# Altium PCB PCB1.PcbDoc (part 2 of 4)
Units mm, origin at the board's own origin, x right, y up, seen from the top; angles counter-clockwise.
Board outline 120 x 70 mm, 6 copper layers (SIG TOP, GND1, PWR, SIG, GND2, SIG BOT), stack 1.538 mm thick; 355 components, 304 nets, 1156 pads, 166 vias.
Unrouted connection lines stored in the file: 534.
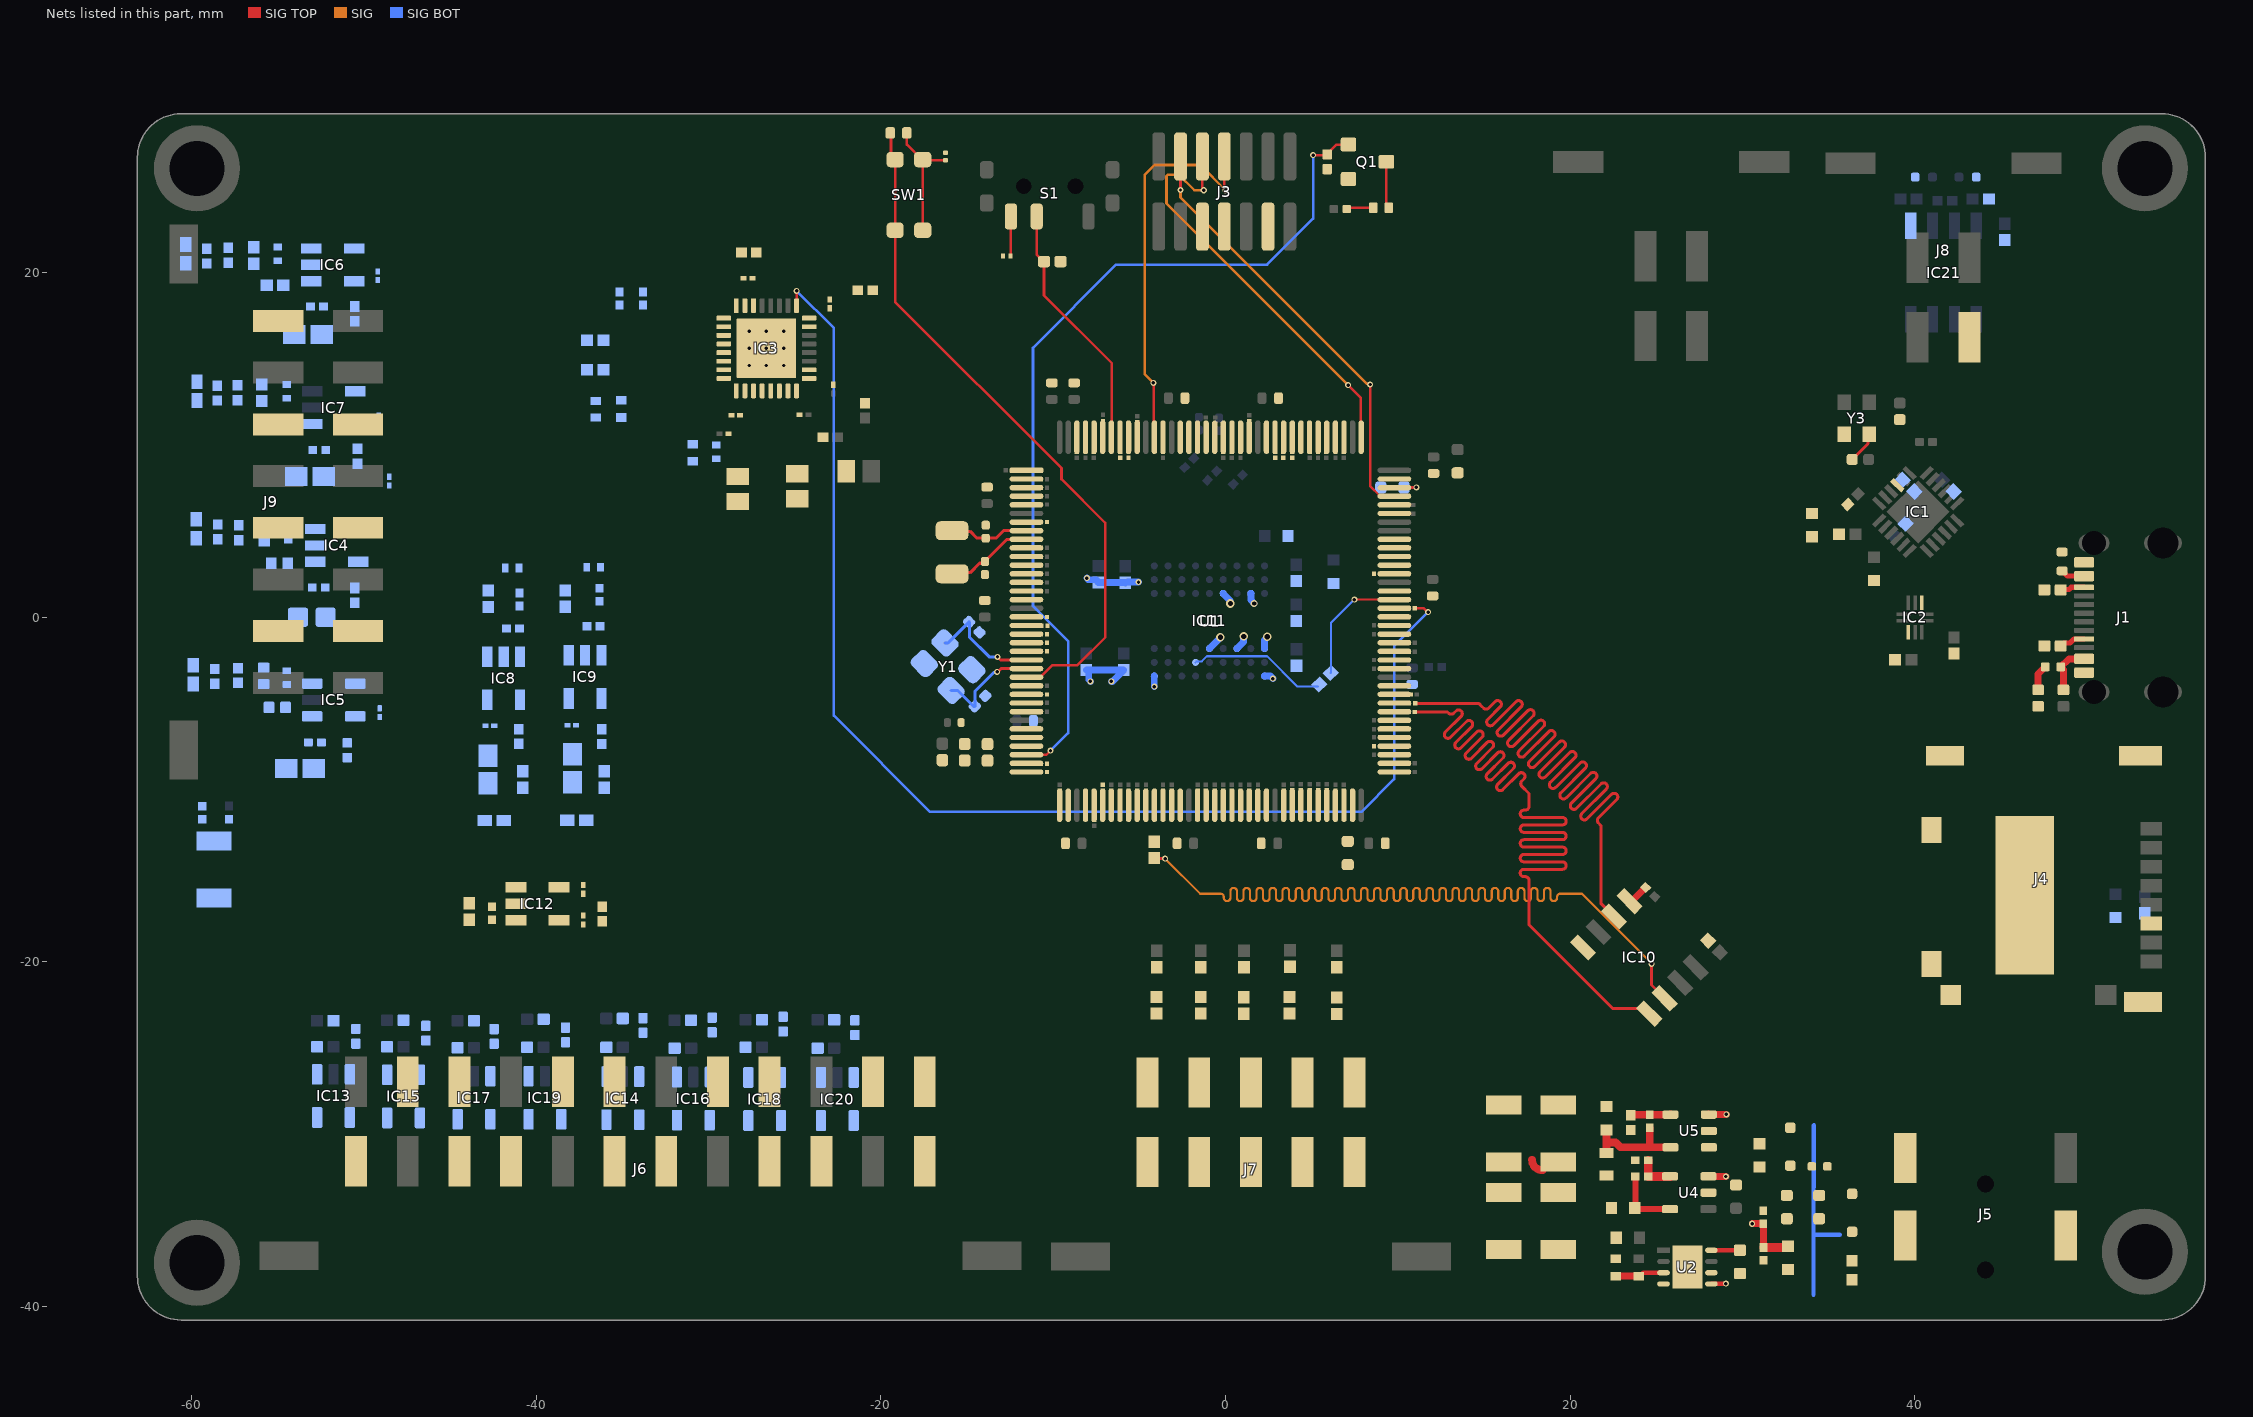
[diagram p5: the nets of this part, all layers, seen from the top]

## Footprints (in the part's own frame and the unit in brackets; to place one, negate y for a bottom-side part, rotate by r counter-clockwise, add the part's x,y. Pads: shape width x height; smd on the part's side, far side on the other; paste and mask are expansions set on the pad) (continued)
IS42S16800J-7BLI-TR [mm]
  round 0.41 smd: A1(-3.116,3.22) A2(-2.316,3.22) A3(-1.516,3.22) A7(1.684,3.22) A8(2.484,3.22) A9(3.284,3.22) B1(-3.116,2.42) B2(-2.316,2.42) B3(-1.516,2.42) B7(1.684,2.42) B8(2.484,2.42) B9(3.284,2.42) C1(-3.116,1.62) C2(-2.316,1.62) C3(-1.516,1.62) C7(1.684,1.62) C8(2.484,1.62) C9(3.284,1.62) D1(-3.116,0.82) D2(-2.316,0.82) D3(-1.516,0.82) D7(1.684,0.82) D8(2.484,0.82) D9(3.284,0.82) E1(-3.116,0.02) E2(-2.316,0.02) E3(-1.516,0.02) E7(1.684,0.02) E8(2.484,0.02) E9(3.284,0.02) F1(-3.116,-0.78) F2(-2.316,-0.78) F3(-1.516,-0.78) F7(1.684,-0.78) F8(2.484,-0.78) F9(3.284,-0.78) G1(-3.116,-1.58) G2(-2.316,-1.58) G3(-1.516,-1.58) G7(1.684,-1.58) G8(2.484,-1.58) G9(3.284,-1.58) H1(-3.116,-2.38) H2(-2.316,-2.38) H3(-1.516,-2.38) H7(1.684,-2.38) H8(2.484,-2.38) H9(3.284,-2.38) J1(-3.116,-3.18) J2(-2.316,-3.18) J3(-1.516,-3.18) J7(1.684,-3.18) J8(2.484,-3.18) J9(3.284,-3.18)
  silkscreen extent -4.02,-3.98 4.08,4.12, body extent -4,-4 4,4, height 1.2
MSD12A [mm]
  rect 0.8x1.24 smd: 1(-2.9,5.725) 2(-1.8,5.725) 3(-0.7,5.725) 4(0.4,5.725) 5(1.5,5.725) 6(2.6,5.725) 7(3.7,5.725) 8(4.8,5.725)
  rect 1.15x2.5 smd: 9(-7.145,5.096)
  rect 1.15x2.2 smd: 10(-7.145,-6.234) 14(7.145,5.245)
  rect 1.5x1.15 smd: 11(-2.84,-7.029) 12(4.94,-7.029)
  rect 1.16x1.2 smd: 13(6.74,-5.904)
  rect 9.2x3.4 smd: 15(0.95,-1.605)
  rect 1.16x1.25 smd: CD1(6.74,3.096)
  silkscreen extent -7.07,-7.35 7.07,8.25, body extent -7.47,-7.43 7.47,7.62, height 1.37
NETTIE_SMD [mil]
  rect 10x10 smd paste+0 mask-1000: 1(-7,0) 2(7,0)
  SIG TOP region: -3,-5 3,-5 3,5 -3,5
PCM12SMTBR [mm]
  rrect50% 0.7x1.5 smd: 1(-2.25,1.75) 2(0.75,1.75) 3(2.25,1.75)
  round 0.45 hole 0.9 unplated: MH1(-1.5,0) MH2(1.5,0)
  rrect50% 0.8x1 smd: MP1(-3.65,0.965) MP2(3.65,0.965) MP3(-3.65,-0.965) MP4(3.65,-0.965)
  silkscreen extent -2.8,-2.8 2.8,3.05, body extent -3.85,-2.83 3.85,2.17, height 1.43
QFN40P140X180X50-10N [mm]
  rrect10% 0.85x0.2 smd: 1(-0.65,0.2) 2(-0.65,-0.2) 6(0.65,-0.2) 7(0.65,0.2)
  rrect10% 0.2x0.85 smd: 3(-0.4,-0.85) 4(0,-0.85) 5(0.4,-0.85) 8(0.4,0.85) 9(0,0.85) 10(-0.4,0.85)
  silkscreen extent -1.17,0.7 -0.98,0.9, body extent -0.7,-0.9 0.7,0.9, height 0.48
QFN50P400X400X100-25N-D [mm]
  rect 0.9x0.3 smd: 1(-1.95,1.25) 2(-1.95,0.75) 3(-1.95,0.25) 4(-1.95,-0.25) 5(-1.95,-1.25) 6(-1.95,-0.75) 13(1.95,-1.25) 14(1.95,-0.75) 15(1.95,-0.25) 16(1.95,0.25) 17(1.95,0.75) 18(1.95,1.25)
  rect 0.3x0.9 smd: 7(-1.25,-1.95) 8(-0.75,-1.95) 9(-0.25,-1.95) 10(0.25,-1.95) 11(0.75,-1.95) 12(1.25,-1.95) 19(1.25,1.95) 20(0.75,1.95) 21(0.25,1.95) 22(-0.25,1.95) 23(-0.75,1.95) 24(-1.25,1.95)
  rect 2.6x2.6 smd: 25(0,0)
  silkscreen extent -2.52,1.88 -2.28,2.12, body extent -2.05,-2.05 2.05,2.05, height 1
RASM742TRX [mm]
  rect 1.3x2.9 smd: 1(-4.65,1.15) 2(-4.65,-3.35) 3(4.65,-3.35) 4(4.65,1.15)
  round 0.5 hole 1 unplated: 5(0,3.15) 6(0,-1.85)
  silkscreen extent -5.9,-4.65 4,4.65, body extent -5.1,-4.55 4.7,4.75, height 5.15
RESC1005X40X25LL05T10#1 [mm] "Chip Resistor, 2-Leads, Body 1.00x0.50mm, IPC High Density"
  rrect20% 0.5x0.45 smd: 1(-0.375,0) 2(0.375,0)
  body extent -0.53,-0.27 0.53,0.28, height 0.4
RESC1005X40X25LL05T10#2 [mm] "Chip Resistor, 2-Leads, Body 1.00x0.50mm, IPC High Density"
  rrect25% 0.5x0.45 smd: 1(-0.375,0) 2(0.375,0)
  body extent -0.53,-0.27 0.53,0.28, height 0.4
RESC1005X40X25LL05T10#3 [mm] "Chip Resistor, 2-Leads, Body 1.00x0.50mm, IPC High Density"
  rect 0.5x0.45 smd: 1(-0.375,0) 2(0.375,0)
  body extent -0.53,-0.27 0.52,0.28, height 0.4
RESC1005X40X25LL05T10#4 [mm] "Chip Resistor, 2-Leads, Body 1.00x0.50mm, IPC High Density"
  rrect50% 0.5x0.45 smd: 1(-0.375,0) 2(0.375,0)
  body extent -0.53,-0.27 0.53,0.28, height 0.4
RESC1005X40X25ML05T10#1 [mm] "Chip Resistor, 2-Leads, Body 1.00x0.50mm, IPC Low Density"
  rect 0.7x0.65 smd: 1(-0.475,0) 2(0.475,0)
  body extent -0.53,-0.27 0.53,0.28, height 0.4
RESC1005X40X25ML05T10#2 [mm] "Chip Resistor, 2-Leads, Body 1.00x0.50mm, IPC Low Density"
  rrect50% 0.635x0.65 smd: 1(-0.475,0) 2(0.475,0)
  body extent -0.53,-0.27 0.53,0.28, height 0.4
RESC1005X40X25ML05T10#3 [mm] "Chip Resistor, 2-Leads, Body 1.00x0.50mm, IPC Low Density"
  rrect25% 0.7x0.65 smd: 1(-0.475,0) 2(0.475,0)
  body extent -0.53,-0.27 0.53,0.28, height 0.4
RESC1005X40X25NL05T10#1 [mm] "Chip Resistor, 2-Leads, Body 1.00x0.50mm, IPC Medium Density"
  rrect25% 0.6x0.55 smd: 1(-0.425,0) 2(0.425,0)
  body extent -0.53,-0.27 0.53,0.28, height 0.4
RESC1005X40X25NL05T10#2 [mm] "Chip Resistor, 2-Leads, Body 1.00x0.50mm, IPC Medium Density"
  rect 0.6x0.55 smd: 1(-0.425,0) 2(0.425,0)
  body extent -0.53,-0.27 0.53,0.28, height 0.4
RESC1608X55X25LL10T15 [mm] "Chip Resistor, 2-Leads, Body 1.60x0.80mm, IPC High Density"
  rect 0.6x0.8 smd: 1(-0.65,0) 2(0.65,0)
  body extent -0.85,-0.45 0.85,0.45, height 0.55
SOIC127P600X175-8N [mm]
  rect 1.525x0.65 smd: 1(-2.712,1.905) 2(-2.712,0.635) 3(-2.712,-0.635) 4(-2.712,-1.905) 5(2.712,-1.905) 6(2.712,-0.635) 7(2.712,0.635) 8(2.712,1.905)
  silkscreen extent -3.47,-2.45 1.6,2.58, body extent -3,-2.45 3,2.45, height 1.75
SOT95P280X145-5N#1 [mm]
  rect 1.2x0.6 smd: 1(-1.25,0.95) 2(-1.25,0) 3(-1.25,-0.95) 4(1.25,-0.95) 5(1.25,0.95)
  silkscreen extent -1.85,-1.45 0.3,1.5, body extent -1.4,-1.45 1.4,1.45, height 1.2
SOT95P280X145-5N#2 [mm]
  rrect25% 1.2x0.6 smd: 1(-1.25,0.95) 2(-1.25,0) 3(-1.25,-0.95) 4(1.25,-0.95) 5(1.25,0.95)
  silkscreen extent -1.85,-1.45 0.3,1.5, body extent -1.4,-1.45 1.4,1.45, height 1.2
TLV320AIC3104IRHBR [mm]
  rrect36% 0.85x0.28 smd: 1(-2.781,1.257) 2(-2.781,0.757) 3(-2.781,0.257) 4(-2.781,-0.243) 5(-2.781,-0.743) 6(-2.781,-1.243) 7(-2.781,-1.743) 8(-2.781,-2.243) 17(2.169,-2.243) 18(2.169,-1.743) 19(2.169,-1.243) 20(2.169,-0.743) 21(2.169,-0.243) 22(2.169,0.257) 23(2.169,0.757) 24(2.169,1.257)
  rrect36% 0.28x0.85 smd: 9(-2.056,-2.968) 10(-1.556,-2.968) 11(-1.056,-2.968) 12(-0.556,-2.968) 13(-0.056,-2.968) 14(0.444,-2.968) 15(0.944,-2.968) 16(1.444,-2.968) 25(1.444,1.982) 26(0.944,1.982) 27(0.444,1.982) 28(-0.056,1.982) 29(-0.556,1.982) 30(-1.056,1.982) 31(-1.556,1.982) 32(-2.056,1.982)
  rrect3% 3.45x3.45 smd: 33(-0.306,-0.493)
  silkscreen extent -3.66,-3.07 2.27,2.08, body extent -2.81,-2.99 2.19,2.01, height 1
VARC1005X41N#1 [mm]
  rect 0.85x0.65 smd: 1(-0.55,0) 2(0.55,0)
  silkscreen extent 0,-0.15 0,0.15, body extent -0.5,-0.25 0.5,0.25, height 0.41
VARC1005X41N#2 [mm]
  rect 0.65x0.65 smd: 1(-0.55,0) 2(0.55,0)
  silkscreen extent 0,-0.15 0,0.15, body extent -0.5,-0.25 0.5,0.25, height 0.41
VARC1005X41N#3 [mm]
  rrect50% 0.508x0.65 smd: 1(-0.55,0) 2(0.55,0)
  silkscreen extent 0,-0.15 0,0.15, body extent -0.5,-0.25 0.5,0.25, height 0.41

## Part data
C1 C2 C3 C8 C9 C10 C11 C12 C13 C18 C19 C20 C21 C22 C85 C87 C88 C89 C90 C91 C95 C96 C97 C98 C99 C100 C101 C103 C105 C124 C125 C126: library part CMP-06035-028957-1, "Ceramic Capacitor for Automotive 100nF ±20% 50VDC X7R 0402 Paper T/R", Capacitance=100nF
C4 C5: library part CMP-06035-053638-1, "Ceramic Capacitor for Automotive 10pF ±2% 50VDC X8G 0402 Paper T/R", Capacitance=10pF
C6 C7: library part CMP-06035-005325-1, "Ceramic Capacitor for Automotive 3.3pF ±0.25pF 50VDC C0G 0402 Paper T/R", Capacitance=3.3pF, Case Code (Imperial)=0402, Case Code (Metric)=1005, Dielectric=C0G, Max Operating Temperature=125°C, Min Operating Temperature=-55°C, Package Quantity=50000, Ratings=AEC-Q200, Voltage Rating=50V, Case/Package=0402, Height=0.5mm, Length=0.039inch, Mount="Surface Mount", Packaging="Tape and Reel", Termination=SMD/SMT, Thickness=0.022inch, Voltage Rating (DC)=50V, Weight=0.000212oz, Width=0.5mm
C14 C15 C16 C17 C68 C69 C70 C71 C76 C86 C92 C93 C94 C102 C104: library part CMP-00260-57357036-1, "GCM188C71A225KE02D Multilayer Ceramic Capacitor, 2.2 uF, 10 V, ± 10%, X7S, 0603 [1608 Metric]", Capacitance=2.2uF, Lifecycle Status=Production, NexarPartId=57357036, RoHS=Non-Compliant
C23 C77 C79 C80 C82 C83 C84 C108 C109 C110 C111 C112 C113 C114 C115 C116 C117 C118 C119 C120 C121 C122 C123 C129: library part CMP-06035-028957-1, "Ceramic Capacitor for Automotive 100nF ±20% 50VDC X7R 0402 Paper T/R", Capacitance=100n
C24 C27 C28 C31 C33 C34 C35 C40 C46 C50 C58 C63 C106 C107: library part CMP-06035-001619-1, "Chip Multilayer Ceramic Capacitors for General Purpose, 0201, 0.10uF, X7S, 22%, 20%, 16V", Capacitance=100nF, Dielectric=X7S, Tolerance=20%, Voltage Rating (DC)=16V, Length=600um, Thickness=300um, Width=300um
C25 C26 C29 C32: library part CMP-06035-036014-1, "Chip Multilayer Ceramic Capacitors for General Purpose, 0402, 1.0uF, X7S, 22%, 20%, 6.3V", Capacitance=1uF, Dielectric=X7S, Tolerance=20%, Voltage Rating (DC)=6.3V, Length=1mm, Thickness=500um, Width=500um
C30 C54 C55: library part CMP-06035-031044-1, "Chip Multilayer Ceramic Capacitors for General Purpose, 0805, 10uF, X6S, 22%, 10%, 25V", Capacitance=10uF, Case/Package=0805, Dielectric=X6S, Tolerance=10%, Voltage Rating (DC)=25V, Length=2mm, Thickness=1.25mm, Width=1.25mm
C36 C41 C47 C51 C56 C59 C64: library part CMP-06035-055122-1, "Ceramic Capacitor for Automotive 10nF ±10% 50VDC X7R 0402 Paper T/R", Capacitance=10nF
C37 C42 C48 C52 C60 C65: library part CMP-06035-021772-1, "Ceramic Capacitor for Automotive 10uF ±20% 4VDC X7T 0603 Paper T/R", Capacitor=10u
C38 C39 C43 C44 C61 C62 C66 C67: library part CMP-06035-007229-1, "Ceramic Capacitor for Automotive 220pF ±10% 50VDC X7R 0402 Paper T/R", Capacitance=220pF, Case Code (Imperial)=0402, Case Code (Metric)=1005, Dielectric=X7R, Max Operating Temperature=125°C, Min Operating Temperature=-55°C, Package Quantity=50000, Tolerance=10%, Voltage Rating=50V, Case/Package=0402, Depth=0.5mm, Height=0.5mm, Length=1mm, Mount="Surface Mount", Packaging="Tape and Reel", Radiation Hardening=No, Termination=SMD/SMT, Voltage Rating (DC)=50V
C45: library part CMP-06035-055308-1, "Ceramic Capacitor for Automotive 47uF ±10% 10VDC X7S 1210 Embossed T/R", Capacitance=47uF
C49 C53: library part CMP-06035-038116-1, "Ceramic Capacitor for Automotive 1nF ±10% 50VDC X7R 0402 Paper T/R", Capacitance=1nF
C57: library part CMP-00260-135863758-1, "GCM155D70G475ME36D AC 2C 216S Skt Recp", Capacitance=4.7µF, Case/Package=0402, Max Operating Temperature=125°C, Min Operating Temperature=-55°C, Tolerance=20%, Voltage Rating=4V, Height=700µm, Lifecycle Status=Production, Material=Ceramic, NexarPartId=135863758
C72 C73 C74 C75: library part CMP-06035-055308-1, "Ceramic Capacitor for Automotive 47uF ±10% 10VDC X7S 1210 Embossed T/R", Capacitance=47u
C78 C81: library part CMP-00260-57357036-1, "GCM188C71A225KE02D Multilayer Ceramic Capacitor, 2.2 uF, 10 V, ± 10%, X7S, 0603 [1608 Metric]", Capacitance=2u2, Lifecycle Status=Production, NexarPartId=57357036, RoHS=Non-Compliant
D1 D5: "Schottky Diode", Manufacturer_Name=Nexperia, Mouser Part Number=771-BAT165AX, Arrow Part Number=BAT165AX, Arrow Price/Stock=https://www.arrow.com/en/products/bat165ax/nexperia?utm_currency=USD&region=nac, Datasheet Link=https://assets.nexperia.com/documents/data-sheet/BAT165A.pdf, Height=1.1mm, Manufacturer_Part_Number=BAT165AX, Mouser Price/Stock=https://www.mouser.co.uk/ProductDetail/Nexperia/BAT165AX?qs=1fQ7IOp4WriMQ9TlJoQ5jw%3D%3D
D2: library part CMP-08952-000015-1, "LED GREEN CLEAR 1006 SMD", Colour=Green, Forward Current=20mA, Forward Voltage=2.1V, Manufacturer=Rohm, Package=SML-P1, Power Dissipation=52mW, Reverse Voltage=5V, Temperature="-40°C to +85°C", Temperature Range High=+85°C, Temperature Range Low=-40°C, Automotive=No, Category=Diode, ComponentLink2Description=Datasheet, ComponentLink2URL=https://d1d2qsbl8m0m72.cloudfront.net/en/products/databook/datasheet/opto/led/chip_mono/sml-p1-e.pdf, Device Class L1=Optoelectronics, Device Class L2=LEDs, Device Class L3=unset, Digikey Description="LED GREEN CLEAR 1006 SMD", Height=0.25mm, Lead Free=Yes, Led Orientation="Top View", Luminous Intensity=10mcd, Manufacturer Part Number=SML-P13PTT86R, Mouser Description="LED Uni-Color Green 2-Pin Chip 0402(1006Metric) T/R", Octopart=https://octopart.com/sml-p13ptt86r-rohm-59370256, RoHS=TRUE, Wavelength=560nm
D3 D4: library part CMP-07200-000010-1, "TVS DIODE 5.3V 14V 2X3DFN", Capacitance=0.3pF, Case/Package=DFN, Clamping Voltage=14V, Max Operating Temperature=150°C, Min Breakdown Voltage=7V, Min Operating Temperature=-55°C, Peak Pulse Current=3A, Power Line Protection=No, Resistor Type=Zener, Reverse Standoff Voltage=5.3V, Direction=Bidirectional, Element Configuration=Single, Lead Free="Lead Free", Mount="Surface Mount", Number of Bidirectional Channels=1, Number of Pins=2, Packaging="Tape and Reel", RoHS Compliant=Yes, Working Voltage=5.3V
FB1: library part CMP-06046-001231-1, "Chip Ferrite Bead, 0402, 1000Ω @ 100MHz, 0.65Ω, 25%, 300mA"
FB2 FB3: library part CMP-08257-000274-1, "Power line Ferrite Bead 120Ω @ 100MHz 1.5A DCR 0.095Ω SMD 0402", Case Code (Imperial)=0402, Case Code (Metric)=1005, DC Resistance (DCR)=95mR, Max Current Rating=1.5A, Max Operating Temperature=125°C, Min Operating Temperature=-55°C, Package Quantity=10000, Test Frequency=100MHz, Tolerance=25%, Case/Package=0402, Height=0.022inch, Impedance=120R, Length=0.039inch, Max DC Current=1.5A, Mount="Surface Mount", Number of Lines=1, Packaging="Tape and Reel", RoHS Compliant=Yes, Termination=SMD/SMT, Weight=2.3E-05oz, Width=0.02inch
IC1: "Integrated Circuit", Manufacturer_Name=Microchip, Mouser Part Number=886-USB3318C-CP-TR, Arrow Part Number=USB3318C-CP-TR, Arrow Price/Stock=null?region=nac, Datasheet Link=http://www.microchip.com/mymicrochip/filehandler.aspx?ddocname=en562029, Height=1mm, Manufacturer_Part_Number=USB3318C-CP-TR, Mouser Price/Stock=https://www.mouser.co.uk/ProductDetail/Microchip-Technology/USB3318C-CP-TR?qs=pA5MXup5wxEqKRd0j%252Bo%252BXA%3D%3D
IC2: "Integrated Circuit", Manufacturer_Name=NXP, Mouser Part Number=771-NX3DV42GU115, Arrow Part Number=NX3DV42GU,115, Arrow Price/Stock=https://www.arrow.com/en/products/nx3dv42gu115/nxp-semiconductors?region=nac, Datasheet Link=http://www.nxp.com/docs/en/data-sheet/NX3DV42.pdf, Height=0.5mm, Manufacturer_Part_Number=NX3DV42GU,115, Mouser Price/Stock=https://www.mouser.co.uk/ProductDetail/NXP-Semiconductors/NX3DV42GU115?qs=cbprxTG2Yq%252BinzuyAklGVQ%3D%3D
IC3: "Integrated Circuit", Manufacturer_Name="Texas Instruments", Mouser Part Number=595-TLV320C3104IRHBR, Arrow Part Number=TLV320AIC3104IRHBR, Arrow Price/Stock=https://www.arrow.com/en/products/tlv320aic3104irhbr/texas-instruments?utm_currency=USD&region=nac, Datasheet Link=http://www.ti.com/lit/ds/symlink/tlv320aic3104.pdf, Height=1mm, Manufacturer_Part_Number=TLV320AIC3104IRHBR, Mouser Price/Stock=https://www.mouser.co.uk/ProductDetail/Texas-Instruments/TLV320AIC3104IRHBR?qs=t6sYTo5dwUzbYVbTYmm%2FAg%3D%3D
IC4 IC5 IC6 IC7 IC8 IC9 IC12 IC13 IC14 IC15 IC16 IC17 IC18 IC19 IC20: "Integrated Circuit", Manufacturer_Name="Texas Instruments", Mouser Part Number=595-TLV9161IDBVR, Arrow Part Number=TLV9161IDBVR, Arrow Price/Stock=https://www.arrow.com/en/products/tlv9161idbvr/texas-instruments?utm_currency=USD&region=nac, Datasheet Link=https://www.ti.com/lit/ds/symlink/tlv9161.pdf?HQS=dis-mous-null-mousermode-dsf-pf-null-wwe&ts=1675947383550&ref_url=https%253A%252F%252Fwww.mouser.de%252F, Height=1.45mm, Manufacturer_Part_Number=TLV9161IDBVR, Mouser Price/Stock=https://www.mouser.co.uk/ProductDetail/Texas-Instruments/TLV9161IDBVR?qs=Rp5uXu7WBW%2FkWJAGvxG3xQ%3D%3D
IC10: "Integrated Circuit", Manufacturer_Name="Integrated Silicon Solution Inc.", Mouser Part Number=870-IS25LP080DJNLETR, Arrow Part Number=IS25LP080D-JNLE-TR, Arrow Price/Stock=https://www.arrow.com/en/products/is25lp080d-jnle-tr/integrated-silicon-solution-inc?region=nac, Datasheet Link=https://www.mouser.com/datasheet/2/198/25LP-WP080D-1003192.pdf, Height=1.75mm, Manufacturer_Part_Number=IS25LP080D-JNLE-TR, Mouser Price/Stock=https://www.mouser.co.uk/ProductDetail/ISSI/IS25LP080D-JNLE-TR?qs=pif5%252B9MYt0VkH9msMJ5aTQ%3D%3D
IC11: "Integrated Circuit", Manufacturer_Name="Integrated Silicon Solution Inc.", Datasheet Link=https://www.mouser.be/datasheet/2/198/42_45S81600J_16800J-3460583.pdf, Height=1.2mm, Manufacturer_Part_Number=IS42S16800J-7BLI-TR
IC21: "Integrated Circuit", Arrow Part Number=SP3494CN-L/TR, Manufacturer_Name=MaxLinear, Mouser Part Number=701-SP3494CN-L/TR, Arrow Price/Stock=https://www.arrow.com/en/products/sp3494cn-ltr/maxlinear-inc?region=nac, Datasheet Link=https://www.arrow.com/en/products/sp3494cn-ltr/maxlinear-inc?region=nac, Height=1.75mm, Manufacturer_Part_Number=SP3494CN-L/TR, Mouser Price/Stock=https://www.mouser.co.uk/ProductDetail/MaxLinear/SP3494CN-L-TR?qs=3EMgrMjM0faUFCPV%252BPTaUQ%3D%3D
J1: library part CMP-04767-000028-2, "CONN RCP USB2.0 TYP C 24P SMD RA", Current Rating=1.25A, Max Operating Temperature=85°C, Min Operating Temperature=-40°C, Voltage Rating=30V, Contact Material="Gold, Nickel", Gender=Receptacle, Height=3.36mm, NexarPartId=117190526, Number of Contacts=16, USB Standard="USB 2.0"
J2 J8: "Connector", Manufacturer_Name="TE Connectivity", Mouser Part Number=571-3-794627-4, Arrow Part Number=3-794627-4, Arrow Price/Stock=https://www.arrow.com/en/products/3-794627-4/te-connectivity?utm_currency=USD&region=europe, Datasheet Link=https://www.te.com/commerce/DocumentDelivery/DDEController?Action=srchrtrv&DocNm=micro-mate-n-lok-connector-qrg&DocType=Data%20Sheet&DocLang=English&PartCntxt=3-794627-4&DocFormat=pdf, Height=8.8mm, Manufacturer_Part_Number=3-794627-4, Mouser Price/Stock=https://www.mouser.co.uk/ProductDetail/TE-Connectivity-AMP/3-794627-4?qs=FGSkXkE%2FZ3Wegb353BDzUA%3D%3D
J3: library part CMP-02766-001448-1, "CONN HEADER SMD 14POS 1.27MM", Color=Black, Max Operating Temperature=125°C, Min Operating Temperature=-55°C, Package Quantity=1, Connector Type="Male Pin", Contact Material=Bronze, Contact Mating Length=0.12inch, Contact Plating=Gold, Contact Type="Male Pin", Depth=5.84mm, Gender=Male, Housing Color=Black, Housing Material=Polymer, Lead Free="Lead Free", Length=8.89mm, Mount="Surface Mount", Number of Contacts=14, Number of Positions=14, Number of Rows=2, Orientation=Straight, Packaging=Rail/Tube, Pitch=1.27mm, Radiation Hardening=No, RoHS Compliant=Yes, Row Spacing=0.05inch, Series=FTSH, Termination=Solder
J4: "Connector", Manufacturer_Name="Same Sky", Mouser Part Number=179-MSD-12-A, Arrow Part Number=MSD-12-A, Arrow Price/Stock=https://www.arrow.com/en/products/msd-12-a/cui-devices?utm_currency=USD&region=nac, Datasheet Link=https://www.sameskydevices.com/product/resource/MSD-12-A.pdf, Height=1.6mm, Manufacturer_Part_Number=MSD-12-A, Mouser Price/Stock=https://www.mouser.co.uk/ProductDetail/Same-Sky/MSD-12-A?qs=Z%252BL2brAPG1KTGgvYejyeAQ%3D%3D
J5: "Connector", Manufacturer_Name=Switchcraft, Mouser Part Number=502-RASM742TRX, Arrow Part Number=RASM742TRX, Arrow Price/Stock=https://www.arrow.com/en/products/rasm742trx/switchcraft?region=nac, Datasheet Link=https://www.mouser.ph/ProductDetail/Switchcraft/RASM742TRX?qs=mcPJWgAPNrdcPY6U4InXHg%3D%3D&srsltid=AfmBOooMj0kEPMqk1k0gwFmsjJjNoSaW62hNPqqtUxzbBym_46hZI4RS, Height=5.334mm, Manufacturer_Part_Number=RASM742TRX, Mouser Price/Stock=https://www.mouser.co.uk/ProductDetail/Switchcraft/RASM742TRX?qs=mcPJWgAPNrdcPY6U4InXHg%3D%3D
J6: "Connector", Manufacturer_Name="TE Connectivity", Datasheet Link=https://www.te.com/commerce/DocumentDelivery/DDEController?Action=srchrtrv&DocNm=micro-mate-n-lok-connector-qrg&DocType=Data%20Sheet&DocLang=English&PartCntxt=5-794627-4&DocFormat=pdf, Height=8.8mm, Manufacturer_Part_Number=5-794627-4
J7: "Connector", Manufacturer_Name="TE Connectivity", Mouser Part Number=571-4-794627-0, Arrow Part Number=4-794627-0, Arrow Price/Stock=https://www.arrow.com/en/products/4-794627-0/te-connectivity, Datasheet Link=https://www.te.com/commerce/DocumentDelivery/DDEController?Action=srchrtrv&DocNm=micro-mate-n-lok-connector-qrg&DocType=Data%20Sheet&DocLang=English&PartCntxt=4-794627-0&DocFormat=pdf, Height=8.67mm, Manufacturer_Part_Number=4-794627-0, Mouser Price/Stock=https://www.mouser.co.uk/ProductDetail/TE-Connectivity-AMP/4-794627-0?qs=%252BzEhGsOvNvVYq3FriCmQcA%3D%3D
J9: "Connector", Manufacturer_Name="TE Connectivity", Mouser Part Number=571-4-794629-6, Arrow Part Number=4-794629-6, Arrow Price/Stock=https://www.arrow.com/en/products/4-794629-6/te-connectivity?region=nac, Datasheet Link=https://www.te.com/commerce/DocumentDelivery/DDEController?Action=srchrtrv&DocNm=micro-mate-n-lok-connector-qrg&DocType=Data%20Sheet&DocLang=English&PartCntxt=4-794629-6&DocFormat=pdf, Height=8.67mm, Manufacturer_Part_Number=4-794629-6, Mouser Price/Stock=https://www.mouser.co.uk/ProductDetail/TE-Connectivity-AMP/4-794629-6?qs=vczR1Rbrl535QN5OwRvF4g%3D%3D
NT1 NT2 NT3 NT4 NT5 NT6 NT7 NT8 NT9 NT10 NT11 NT12 NT13 NT14 NT15 NT16 NT17 NT18 NT19 NT20 NT21 NT22 NT23 NT24 NT25 NT26 NT27 NT28 NT29 NT30 NT31 NT32 NT33 NT34 NT35 NT36 NT37 NT38 NT39 NT40 NT41 NT42 NT43 NT44 NT45 NT46 NT47 NT48 NT49 NT50 NT51 NT52 NT53 NT54 NT55 NT56 NT57 NT58 NT59 NT60 NT61 NT62 NT63 NT64 NT65 NT66 NT67 NT68 NT69 NT70 NT71 NT72 NT73 NT74 NT75 NT76 NT77 NT78 NT79 NT80 NT81 NT82 NT83 NT84 NT85 NT86 NT87 NT88 NT89 NT90 NT91: library part CMP-026-000007-1, "Net Tie", altium.hash=E97C61A79E216CA6C80CDA4F77C18B20, Design Item ID=NetTie_SMD, Source=HotBoardReal.SCHLIB
Q1: library part CMP-32901-000180-1, "MOSFET N-CH 60V 0.3A SOT23", Case/Package=SOT-23, Continuous Drain Current (ID)=300mA, Drain to Source Voltage (Vdss)=60V, Gate to Source Voltage (Vgs)=20V, Input Capacitance=20pF, Max Operating Temperature=150°C, Max Power Dissipation=500mW, Min Operating Temperature=-55°C, Halogen Free="Halogen Free", Lead Free="Lead Free", Max Dual Supply Voltage=60V, Mount="Surface Mount", Number of Pins=3, Packaging="Tape and Reel", Rds On Max=3R, Rise Time=3.3ns
R1: library part CMP-2002-07343-1, Manufacturer="Yageo / Phycomp", Resistance=100k, Part Number=RC0402FR-07100KL
R2 R8 R34: library part CMP-26527-007617-1, "RES 0 OHM JUMPER 1/16W 0402", Case Code (Imperial)=0402, Case Code (Metric)=1005, Current Rating=1A, Max Operating Temperature=155°C, Max Power Dissipation=63mW, Min Operating Temperature=-55°C, Resistance=0R, Resistor Type="Thick Film", Working Voltage=50V, Case/Package=0402, Construction=Rectangular, Contact Plating=Tin, Depth=0.5mm, Features="Automotive AEC-Q200", Height=0.016inch, Lead Free="Lead Free", Length=0.039inch, Military Standard=Not, Mount="Surface Mount", Number of Terminations=2, Packaging="Tape and Reel", Power Rating=63mW, Radiation Hardening=No, RoHS Compliant=Yes, Series=RMCF, Technology="THICK FILM", Width=0.02inch
R3 R9 R10 R11: library part CMP-2002-08025-1, Manufacturer="Yageo / Phycomp", Resistance=5k1, Part Number=RC0402JR-075K1L
R4 R13 R46 R47 R48 R49 R52 R54 R55 R56 R57 R58 R61: library part CMP-1011-00114-2, Manufacturer="Yageo / Phycomp", Resistance=47k, Part Number=RC0402JR-0747KL
R5: library part CMP-2002-08067-1, Manufacturer=Yageo, Resistance=150R, Part Number=RC0402JR-13150RL
R6 R68 R69: library part CMP-2002-08082-1, Manufacturer=Yageo, Resistance=33R, Part Number=RC0402JR-1333RL
R7: library part CMP-1011-00838-2, Manufacturer="Yageo / Phycomp", Resistance=8k06, Part Number=RC0402FR-07806KL
R12 R29 R33 R36 R37 R59 R72 R73 R74 R75 R76: library part CMP-2002-07854-2, "RESISTOR 0402 10K 1%", Case Code (Imperial)=0402, Case Code (Metric)=1005, Max Operating Temperature=155°C, Min Operating Temperature=-55°C, Power Rating=62.5mW, Resistance=10kR, Resistance Tolerance=1%, Resistor Type="Thick Film", Temperature Coefficient=100ppm/°C, Voltage Rating=50V, Case/Package=0402, Construction=Rectangular, Contact Plating=Tin, Depth=0.5mm, Lead Free="Lead Free", Length=1mm, Military Standard=Not, Number of Pins=2, Number of Terminations=2, Packaging="Tape and Reel", Radiation Hardening=No, REACH SVHC="No SVHC", RoHS Compliant=Yes, Series=RC, Technology="THICK FILM", Termination=SMD/SMT, Tolerance=1%, Voltage Rating (DC)=50V, Working Voltage=50V
R14 R15: library part CMP-13261-005440-1, "Res Thick Film 0402 4.7kΩ 5% 0.063W ±100ppm/°C Molded SMD T/R", Case Code (Imperial)=0402, Case Code (Metric)=1005, Max Operating Temperature=125°C, Max Power Dissipation=63mW, Min Operating Temperature=-55°C, Package Quantity=1, Resistance=4.7kR, Temperature Coefficient=100ppm/°C, Tolerance=5%, Voltage Rating (DC)=50V, Case/Package=0402, Composition="Thick Film", Contact Plating=Tin, Depth=0.5mm, Features="Moisture Resistant", Height=0.016inch, Lead Free="Lead Free", Length=1mm, Military Standard=Not, Mount="Surface Mount", Number of Terminations=2, Packaging="Tape and Reel", Power Rating=63mW, Radiation Hardening=No, Width=0.02inch
R16 R19 R20 R23 R26 R30 R38 R41 R42 R45: library part CMP-2002-07947-3, "RES SMD 1M OHM 5% 1/16W 0402", Case Code (Imperial)=0402, Case Code (Metric)=1005, Max Operating Temperature=155°C, Max Power Dissipation=63mW, Min Operating Temperature=-55°C, Package Quantity=1, Power Rating=62.5mW, Resistance=1MR, Resistance Tolerance=5%, Resistor Type="Thick Film", Temperature Coefficient=100ppm/°C, Voltage Rating=50V, Case/Package=0402, Construction=Rectangular, Depth=0.5mm, Features="Moisture Resistant", Height=0.016inch, Lead Free="Lead Free", Length=1mm, Military Standard=Not, Number of Terminations=2, Packaging="Tape and Reel", REACH SVHC="No SVHC", RoHS Compliant=Yes, Series=RC, Size Code=0402, Termination=SMD/SMT, Tolerance=5%, Weight=2.3E-05oz, Width=0.02inch
R17 R21 R28 R32 R39 R43 R60 R62 R63 R64 R65 R66 R67 R70 R71: library part CMP-2002-07914-1, Manufacturer="Yageo / Phycomp", Resistance=100R, Part Number=RC0402JR-07100RL
R18 R22 R24 R25 R27 R31 R40 R44: library part CMP-2002-01782-2, "RES 1kΩ ±5% 0.063W 0402", Case Code (Imperial)=0402, Case Code (Metric)=1005, Max Operating Temperature=155°C, Max Power Dissipation=63mW, Min Operating Temperature=-55°C, Power Rating=62.5mW, Resistance=1kR, Resistor Type="Thick Film", Temperature Coefficient=100ppm/°C, Tolerance=5%, Voltage Rating=50V, Case/Package=0402, Features="Moisture Resistant", Height=0.015inch, Lead Free="Lead Free", Length=0.039inch, Number of Terminations=2, Packaging="Tape and Reel", RoHS Compliant=Yes, Series=AC, Termination=SMD/SMT, Weight=2.3E-05oz, Width=0.5mm
R35: library part CMP-00621-24490980-1, "RC0402JR-0750RL SMD Chip Resistor, 50 Ohm, ± 5%, 63 mW, 0402 [1005 Metric], Thick Film, General Purpose", Case/Package=0402, Max Operating Temperature=155°C, Max Power Dissipation=63mW, Min Operating Temperature=-55°C, Resistance=50Ω, Temperature Coefficient=100ppm/°C, Tolerance=5%, Composition="Thick Film", Features="Moisture Resistant", Height=406.4µm, Lead Free="Lead Free", Length=990.6µm, NexarPartId=24490980, Number of Terminations=2, Packaging="Tape & Reel (TR)", RoHS=Compliant, Schedule B="8533210045, 8533210045", Width=508µm
R50: library part CMP-2002-07162-1, Manufacturer="Yageo / Phycomp", Resistance=91k, Part Number=RC0402JR-0791KL
R51: library part CMP-2000-04315-1, Manufacturer=Yageo, Resistance=10R, Part Number=RC0603JR-1310RL
R53: library part CMP-2002-07928-1, Manufacturer="Yageo / Phycomp", Resistance=15k, Part Number=RC0402JR-0715KL
R77 R79: library part CMP-2002-07992-1, Manufacturer="Yageo / Phycomp", Resistance=390R, Part Number=RC0402JR-07390RL
R78: library part CMP-2002-07370-1, Manufacturer="Yageo / Phycomp", Resistance=120R, Part Number=RC0402FR-07120RL
RV1 RV2 RV3 RV4 RV5 RV6 RV7 RV8: "Varistor", Manufacturer_Name=Bourns, Mouser Part Number=652-CG0402MLU-12G, Arrow Part Number=CG0402MLU-12G, Arrow Price/Stock=https://www.arrow.com/en/products/cg0402mlu-12g/bourns?utm_currency=USD&region=nac, Datasheet Link=https://bourns.com/docs/product-datasheets/mlu.pdf?sfvrsn=1940d498_27, Height=0.41mm, Manufacturer_Part_Number=CG0402MLU-12G, Mouser Price/Stock=https://www.mouser.co.uk/ProductDetail/Bourns/CG0402MLU-12G?qs=m8myXnDJXpUNz33UIHxVhA%3D%3D
S1: "Switch", Manufacturer_Name="C & K COMPONENTS", Mouser Part Number=611-PCM12SMTBR, Arrow Part Number=PCM12SMTBR, Arrow Price/Stock=https://www.arrow.com/en/products/pcm12smtbr/ck?utm_currency=USD&region=europe, Datasheet Link=https://www.ckswitches.com/media/1424/pcm.pdf, Height=1.4mm, Manufacturer_Part_Number=PCM12SMTBR, Mouser Price/Stock=https://www.mouser.co.uk/ProductDetail/CK/PCM12SMTBR?qs=By6Nw2ByBD1OEOnWcdZb2g%3D%3D
SW1: library part CMP-10040-000003-1, "SWITCH TACTILE SPST-NO 0.05A 32V", Contact Resistance=100mΩ, Current Rating=50mA, Manufacturer="C&K Components", Operating Force=2N, Temperature="-40°C to +85°C", Temperature Range High=+85°C, Temperature Range Low=-40°C, Voltage Rating Dc=32V, Automotive=No, Category=Switch, ComponentLink2Description=Datasheet, ComponentLink2URL=https://www.ckswitches.com/media/1480/kmr4.pdf, Device Class L1=Electromechanical, Device Class L2=Switches, Device Class L3="Tactile Switches", Digikey Description="SWITCH TACTILE SPST-NO 0.05A 32V", Electromechanical Life=100000Cycles, Height=2.5mm, Lead Free=Yes, Manufacturer Part Number="KMR421NG LFS", Mount="Surface Mount", Mouser Description="Switch Tactile N.O. SPST Round Button Gull Wing 0.05A 32VDC 1VA 2N SMD Automotive T/R", Octopart=https://octopart.com/kmr421nglfs-c%26k+components-7226706, Package="KMR421NG LFS", RoHS=TRUE, Throw Configuration=SPST-NO
U1: library part CMP-12105-000148-1, "IC MCU 32BIT 1MB FLASH 144LQFP"
U2: library part CMP-04917-000370-1, "IC OPAMP", RoHS Compliant=Yes
U4 U5: library part CMP-07128-000004-1, "300 MA LOW IQ WIDE INPUT", Dropout Voltage=480mV, Manufacturer="On Semiconductor", Max Junction Temp=+125°C, Max Supply Voltage=24V, Min Supply Voltage=2.5V, Nominal Supply Current=50-300uA, Output Current=300mA, Output Voltage=1.2-5V, Package=419AE-01, Temperature="to +125°C", Accuracy Percentage=2%, Automotive=No, Category=IC, ComponentLink2Description=Datasheet, ComponentLink2URL=https://www.onsemi.com/pub/Collateral/NCP718-D.PDF, Device Class L1="Integrated Circuits (ICs)", Device Class L2="Power Management ICs", Device Class L3="Voltage Regulators - Linear", Digikey Description="300 MA LOW IQ WIDE INPUT", Height=1mm, Lead Free=Yes, Manufacturer Part Number=NCP718BSNADJT1G, Mouser Description="LDO Regulator, 300 mA, Wide Vin, Ultra-Low Iq Adjustable, Non-Active Discharge, TSOT23-5", Number Of Outputs=1, Octopart=https://octopart.com/ncp718bsnadjt1g-on+semiconductor-87658781, Output Type=AdjustableProgrammable, RoHS=TRUE, Standoff Height=0.01mm, Temperature Range High=+125°C
Y1: library part CMP-27762-015132-1, "Crystal 25MHz ±20ppm (Tol) ±30ppm (Stability) 18pF FUND 60Ω 4-Pin SMD T/R", Case/Package=SMD/SMT, ESR (Equivalent Series Resistance)=60R, Frequency=25MHz, Frequency Stability=30ppm, Frequency Tolerance=20ppm, Load Capacitance=18pF, Max Operating Temperature=85°C, Min Operating Temperature=-40°C, Package Quantity=3000, Depth=2.5mm, Height=0.039inch, Length=3.2mm, Mount="Surface Mount", Number of Pins=4, Packaging="Tape and Reel", Radiation Hardening=No, Series=ABM8G, Series Resistance=60R, Termination=SMD/SMT, Tolerance=20ppm, Width=2.5mm
Y2: library part CMP-40224-000010-1, "CRYSTAL 32.768KHZ 6PF SMD", Frequency=32.768kHz, Load Capacitance=6pF, Manufacturer="ECS Inc.", Package=ECX-34Q, Temperature="-40°C to +85°C", Temperature Range High=+85°C, Temperature Range Low=-40°C, Tolerance=10ppm, Automotive=Yes, Automotive Grade="Grade 3", Category=Crys, ComponentLink2Description=Datasheet, ComponentLink2URL=https://ecsxtal.com/store/pdf/ECX-34Q.pdf, Device Class L1="Passive Components", Device Class L2="Crystals / Oscillators", Device Class L3=Crystals, Digikey Description="CRYSTAL 32.768KHZ 6PF SMD", Esr=70kΩ, Height=0.9mm, Lead Free=Yes, Manufacturer Part Number=ECS-.327-6-34QCN-TR, Octopart=https://octopart.com/ecs-.327-6-34qcn-tr-ecs+international-97157707, RoHS=TRUE, Series=ECX-34Q
Y3: "Crystal or Oscillator", Manufacturer_Name=ECS, Mouser Part Number=520-S2520MV130BNTR, Arrow Part Number=ECS-2520MV-130-BN-TR, Arrow Price/Stock=https://www.arrow.com/en/products/ecs-2520mv-130-bn-tr/ecs-international?utm_currency=USD&region=nac, Datasheet Link=https://ecsxtal.com/store/pdf/ECS-2520MV.pdf, Height=0.9mm, Manufacturer_Part_Number=ECS-2520MV-130-BN-TR, Mouser Price/Stock=https://www.mouser.co.uk/ProductDetail/ECS/ECS-2520MV-130-BN-TR?qs=zW32dvEIR3txl7djIFQDkw%3D%3D

## Free pads (board coordinates)
  round 5 hole 3.2: 1(-59.69,26.035) 2(53.34,26.035) 3(-59.69,-37.465) 4(53.34,-36.83)

## Via types
v1: diameter 0.35, hole 0.2, SIG TOP to SIG BOT, tented both sides, 131 vias
v2: diameter 0.5, hole 0.3, SIG TOP to SIG BOT, tented both sides, 22 vias
v3: diameter 0.5, hole 0.2, SIG TOP to SIG BOT, 9 vias
v4: diameter 0.5, hole 0.25, SIG TOP to SIG BOT, tented both sides, 1 vias
v5: diameter 0.4, hole 0.25, SIG TOP to SIG BOT, tented both sides, 1 vias
v6: diameter 0.35, hole 0.2, SIG TOP to SIG BOT, 1 vias
v7: diameter 0.4, hole 0.2, SIG TOP to SIG BOT, tented both sides, 1 vias

## Nets (pads, with @x,y where several pads share a name; then routed paths per layer and width w, separated by ;. In a path a pad name is that pad's centre, name@x,y a point inside that pad or via, vN(x,y) a via of type N, cw(c..) or ccw(c..) an arc to the next point about the centre after c; other vN are vias at no path point)
1V8: C24.1 C25.1 IC3.32
3V3: C26.1 C27.1 C28.1 C29.1 C30.1 C31.1 C32.1 C33.1 C34.1 IC3.7 IC3.18 IC3.24 IC3.25 R14.2 R15.2
+1V8: C23.2 C70.2 IC1.21 R49.2 U4.5 | length 3.9
  SIG TOP w0.35: R49.2@23.774,-32.461 23.774,-34.254 cw(c23.738,-34.254) C70.2@23.738,-34.29 23.799,-34.351 U4.5@25.783,-34.351
+3V3: C8.1 C9.1 C10.1 C11.1 C12.1 C13.1 C15.2 C18.1 C19.1 C20.1 C21.1 C22.1 C69.2 C77.1 C79.2 C80.1 C84.2 C85.1 C86.1 C87.1 C88.1 C91.1 C94.1 C95.1 C96.1 C97.1 C98.1 C99.1 C100.1 C101.1 C102.1 C103.1 C104.1 C105.1 C129.2 FB1.2 IC1.3 IC1.17 IC2.9 IC10.8 IC11.A7 IC11.A9 IC11.B3 IC11.C7 IC11.D3 IC11.E7 IC11.J9 IC21.8 J3.3 J4.4 J9.1 R2.1 R4.2 R5.2 R13.2 R47.2 R54.2 R55.2 R56.2 R57.2 R58.2 R72.2 R73.2 R74.2 R75.2 R76.2 R77.2 S1.1 U1.6 U1.17 U1.30 U1.39 U1.52 U1.62 U1.72 U1.84 U1.95 U1.108 U1.121 U1.131 U1.143 U1.144 U2.1 U4.1 Y3.1 Y3.4 | length 42.5
  SIG TOP w0.178: C91.1@-13.745,6.604 -13.36,6.604 -12.767,6.01 U1.6@-11.557,6.01 ; v1(-12.837,-5.995) -12.834,-5.992 -11.56,-5.992 U1.30@-11.557,-5.99
  SIG TOP w0.25: C8.1@-10.084,12.628 -10.084,12.217 -9.632,11.765 U1.144@-9.632,10.436 ; U1.143@-9.132,10.436 -9.132,11.798 -8.788,12.141 C9.1@-8.788,12.628 ; C10.1@-3.319,12.7 -3.285,12.666 -3.285,12.186 -3.132,12.032 U1.131@-3.132,10.436
  SIG TOP w0.3: U1.121@1.868,10.436 1.868,11.819 2.112,12.062 C11.1@2.112,12.7
  SIG TOP w0.35: C88.1@-16.434,-7.345 -16.434,-7.284 -16.148,-6.998 FB1.2@-16.148,-6.121 ; IC10.8@27.271,-20.319 27.436,-20.483 27.648,-20.483 C103.1@28.673,-19.458
  SIG TOP w0.5: U4.1@28.014,-34.351 29.57,-34.351 ccw(c29.57,-34.305) C69.2@29.616,-34.305
  SIG BOT w0.178: v1(-12.837,-5.995) -12.136,-5.995 C21.1@-12.112,-6.02
  SIG BOT w0.35: v1(-7.976,-1.453) -7.976,-2.011 C101.1@-8.077,-2.112 C99.1@-5.918,-2.112 -5.918,-2.091 -6.452,-1.557 v1(-6.452,-1.499) ; IC11.E7@-0.94,1.371 -0.933,1.364 -0.933,0.755 v2(-0.474,0.296) ; v2@-0.421,0.35 -0.381,0.31 -0.381,0.054 -0.023,-0.304 v2(-0.023,-0.314) ; IC11.D3@-0.14,-1.829 -0.129,-1.84 -0.016,-1.84 0.374,-1.45 0.374,-0.711 v2(-0.023,-0.314) ; IC11.C7@0.66,1.371 0.66,1.368 0.958,1.07 0.958,0.147 0.775,-0.036 v2(0.775,-0.077) ; IC11.B3@1.46,-1.829 1.46,-1.813 1.732,-1.54 1.732,-0.573 1.639,-0.48 v2(1.639,-0.439) ; IC11.A7@2.26,1.371 2.271,1.36 2.271,1.06 2.464,0.868 v2(2.464,0.229) ; C96.1@4.089,0.729 2.964,0.729 v2(2.464,0.229) ; C97.1@4.115,-1.862 4.115,-1.841 2.492,-0.219 2.492,0.2 v2(2.464,0.229) ; v2(-0.023,-0.314) 0.018,-0.314 0.255,-0.077 v2(0.775,-0.077) ; v2(0.775,-0.077) 0.816,-0.077 1.15,-0.411 1.61,-0.411 v2(1.639,-0.439) ; v2(1.639,-0.439) 2.278,0.2 2.435,0.2 v2(2.464,0.229)
  SIG BOT w0.4: v1(-8.052,3.036) -8.052,2.972 -8.044,2.964 C100.1@-7.391,2.964 -7.381,2.953 -5.827,2.953 C98.1@-5.817,2.942 ; C98.1@-5.783,2.982 -5.091,2.982 v4(-5.08,2.972) IC11.J9@-4.14,2.971
  other v2: 2.984,3.149 5.232,3.2 2.438,3.861
+3V3: J6.1 J6.4 J6.7 J6.10 J6.13 J6.16 J6.19 J6.22
+5V: C71.2 R51.1 R52.2 U5.5 | length 6.3
  SIG TOP w0.45: R51.1@22.098,-31.1 22.098,-30.77 22.098,-30.486 ; C71.2@22.098,-29.758 22.098,-30.486 ; R52.2@24.613,-29.636 24.613,-30.744 ccw(c24.638,-30.744) 24.638,-30.77 ; U5.5@25.808,-30.77 22.912,-30.77 22.628,-30.486 22.098,-30.486
+5VA: C35.1 C40.1 C46.1 C50.1 C58.1 C63.1 C72.2 C73.2 C74.2 C75.2 C106.1 C108.1 C109.1 C112.1 C113.1 C116.1 C117.1 C120.1 C121.1 IC4.5 IC5.5 IC6.5 IC7.5 IC8.5 IC9.5 IC12.5 IC13.5 IC14.5 IC15.5 IC16.5 IC17.5 IC18.5 IC19.5 IC20.5 R24.2 R51.2 | length 0.9
  SIG TOP w0.45: 17.78,-31.495 ccw(c18.38,-31.495) C75.2@18.38,-32.095
+VCC: D5.2 J5.3 J5.4 RV7.2
+VCC_FILT: C14.2 C17.2 C76.2 D1.1 FB2.2 R46.2 U2.8 U5.1 | length 1.7
  SIG TOP w0.25: U2.8@28.188,-36.744 29.845,-36.744 C14.2@29.845,-36.739
+VCC_RP: C16.2 D5.1 FB2.1
+VREF: C45.2 R16.2 R20.2 R24.1 R25.2 R26.2 R30.2 R38.2 R42.2
+VUSB: C82.2 FB3.1 J1.A4-B9 J1.B4-A9 RV8.2 | length 4.4
  SIG TOP w0.3: RV8.2@48.539,2.676 48.61,2.676 48.714,2.572 48.714,2.514 48.854,2.375 J1.B4-A9@49.813,2.375
  SIG TOP w0.4: C82.2@48.616,-4.22 48.616,-3.055 FB3.1@48.456,-2.896 48.926,-2.425 J1.A4-B9@49.813,-2.425
+VUSB_FILT: C78.1 C83.2 D1.2 FB3.2 R3.1 | length 1.5
  SIG TOP w0.4: C83.2@47.142,-4.22 47.142,-3.309 FB3.2@47.556,-2.896
ADJ_1V8: R49.1 R50.2 U4.4 | length 2.2
  SIG TOP w0.5: R50.2@24.524,-31.521 R49.1@24.524,-32.461 25.783,-32.461 U4.4@25.783,-32.451
ADJ_3V3: R2.2 R8.1 U2.3 | length 2.8
  SIG TOP w0.25: R2.2@24.028,-38.244 24.228,-38.044 U2.3@25.406,-38.044
  SIG TOP w0.4: R8.1@22.631,-38.244 R2.2@23.978,-38.244
ADJ_5V0: R52.1 R53.2 U5.4 | length 2.3
  SIG TOP w0.45: R53.2@23.495,-28.912 cw(c23.521,-28.912) 23.521,-28.886 R52.1@24.613,-28.886 25.808,-28.886 U5.4@25.808,-28.87
AUDIO_IN_1_FILTERED_LEFT: C37.2 IC3.10
AUDIO_IN_1_FILTERED_RIGHT: C42.2 IC3.12
AUDIO_IN_1_RAW_LEFT: J9.6 R17.1 RV3.2
AUDIO_IN_1_RAW_RIGHT: J9.4 R21.1 RV4.2
AUDIO_IN_2_FILTERED_LEFT: C60.2 IC3.14
AUDIO_IN_2_FILTERED_RIGHT: C65.2 IC3.16
AUDIO_IN_2_RAW_LEFT: J9.8 R39.1 RV1.2
AUDIO_IN_2_RAW_RIGHT: J9.14 R43.1 RV2.2
BUFF_IN_LEFT: C36.2 C59.2 IC4.3 IC6.3 R16.1 R38.1
BUFF_IN_RIGHT: C41.2 C64.2 IC5.3 R20.1 R42.1
CLK_13MHZ: R6.2 Y3.3 | length 1.9
  SIG TOP w0.175: R6.2@36.355,9.144 37.272,10.061 37.272,10.541 Y3.3@37.342,10.61
CODEC_MCLK: IC3.1 NT11.1 | length 73.4
  SIG TOP w0.149: IC3.1@-24.895,18.071 -24.893,18.072 -24.893,18.922 v1(-24.892,18.923) ; NT11.1@10.973,0.508 11.5,0.508 11.725,0.283 v1(11.753,0.283)
  SIG BOT w0.149: v1(-24.892,18.923) -22.733,16.764 -22.733,-5.715 -17.145,-11.303 7.874,-11.303 9.779,-9.398 9.779,-1.691 v1(11.753,0.283)
CODEC_OUT_LEFT: C47.1 C55.1
CODEC_OUT_RIGHT: C51.1 C54.1
CODEC_RST: IC3.31 NT23.1
DEBUG_JTCK_SWCLK: J3.6 U1.109 | length 24.4
  SIG TOP w0.149: J3.6@-1.346,26.724 -1.346,24.835 -1.277,24.765 v1(-1.27,24.765) ; v1(7.112,13.462) 7.837,12.737 7.837,10.467 U1.109@7.868,10.436
  SIG w0.149: v1(-1.27,24.765) -1.815,24.765 -2.704,25.654 -3.359,25.654 -3.429,25.584 -3.429,24.003 v1(7.112,13.462)
DEBUG_JTDO_SWO: J3.8 U1.133 | length 23
  SIG TOP w0.149: v1(-4.191,13.589) -4.161,13.559 -4.161,10.466 U1.133@-4.132,10.436 ; J3.8@-0.076,26.724 -0.076,24.841 v1(0,24.765)
  SIG w0.149: v1(-4.191,13.589) -4.699,14.097 -4.699,25.654 -4.121,26.232 -1.467,26.232 v1(0,24.765)
DEBUG_JTMS_SWDIO: J3.4 U1.105 | length 25.4
  SIG TOP w0.149: v1@-2.617,24.782 J3.4@-2.616,26.724 ; v1(8.382,13.493) 8.382,7.601 8.973,7.01 U1.105@9.794,7.01
  SIG w0.149: v1(-2.617,24.781) -2.617,24.343 8.194,13.531 8.344,13.531 v1(8.382,13.493)
Debug_LED_Gate: Q1.1 R1.1 U1.34 | length 51.5
  SIG TOP w0.149: U1.34@-11.557,-7.99 -10.403,-7.99 v1(-10.16,-7.747) ; v1(5.08,26.797) 5.849,26.797 R1.1@5.893,26.841 5.893,26.866 6.443,27.416 Q1.1@7.13,27.416
  SIG BOT w0.149: v1(-10.16,-7.747) -9.144,-6.731 -9.144,-1.397 -11.176,0.635 -11.176,15.621 -6.35,20.447 2.413,20.447 5.08,23.114 v1(5.08,26.797)
Expression_Out: NT14.1 R60.2
ExpressionTip: J9.2 R59.2
FILTERED_OUT_LEFT: C48.2 J9.10 R29.2 RV5.2
FILTERED_OUT_RIGHT: C52.2 J9.12 R33.2 RV6.2
FMC_SDCLK: IC11.F2 R69.1 | length 8
  SIG BOT w0.125: IC11.F2@-1.74,-2.629 -1.685,-2.574 -1.389,-2.574 -1.088,-2.272 2.408,-2.272 4.174,-4.039 R69.1@5.342,-4.039
FS_SIG1: C1.1 J7.1 NT61.1 R72.1
FS_SIG2: C2.1 J7.2 NT64.1 R73.1
FS_SIG3: C124.1 J7.3 NT66.1 R74.1
FS_SIG4: C125.1 J7.4 NT67.1 R75.1
FS_SIG5: C126.1 J7.5 NT69.1 R76.1
GND: C28.2 C29.2 C30.2 C31.2 C32.2 C34.2 C82.1 C108.2 C109.2 C110.2 C111.2 C112.2 C113.2 C114.2 C115.2 C116.2 C117.2 C118.2 C119.2 C120.2 C121.2 C122.2 C123.2 IC1.25 IC5.2 IC7.2 IC13.2 IC14.2 IC15.2 IC16.2 IC17.2 IC18.2 IC19.2 IC20.2 J6.3 J6.6 J6.9 J6.12 J6.15 J6.18 J6.21 J6.24 J9.3 J9.5 J9.7 J9.9 J9.11 J9.13 J9.15 pad.1 pad.2 pad.3 pad.4 R25.1
  other v1: 23.851,-21.387 24.181,-18.821 44.298,2.235 45.009,3.962 43.586,4.699 43.942,6.325 30.861,6.858 11.938,7.239 44.221,8.103 43.078,9.195 38.862,9.627 42.164,9.677
  other v2: -16.764,1.397 -15.85,1.397 -15.011,1.397 -17.399,2.134 -17.399,2.972 -17.399,3.81 -17.399,4.623 -17.399,5.461
GND: C1.2 C2.2 C4.2 C5.2 C6.2 C7.2 C8.2 C9.2 C10.2 C11.2 C12.2 C13.2 C14.1 C15.1 C16.1 C17.1 C18.2 C19.2 C20.2 C21.2 C22.2 C23.1 C33.2 C35.2 C38.2 C39.2 C40.2 C43.2 C44.2 C45.1 C46.2 C49.2 C50.2 C53.2 C56.2 C57.2 C58.2 C61.2 C62.2 C63.2 C66.2 C67.2 C68.1 C69.1 C70.1 C71.1 C72.1 C73.1 C74.1 C75.1 C76.1 C77.2 C78.2 C79.1 C80.2 C81.2 C83.1 C84.1 C85.2 C86.2 C87.2 C88.2 C89.2 C90.2 C91.2 C92.2 C93.2 C94.2 C95.2 C96.2 C97.2 C98.2 C99.2 C100.2 C101.2 C102.2 C103.2 C104.2 C105.2 C106.2 C107.2 C124.2 C125.2 C126.2 C129.1 D3.1 D4.2 D7.2 D8.2 IC2.3 IC2.8 IC3.17 IC3.21 IC3.26 IC3.33 IC4.2 IC6.2 IC8.2 IC9.2 IC10.4 IC11.A1 IC11.A3 IC11.B7 IC11.C3 IC11.D7 IC11.E3 IC11.J1 IC12.2 IC21.5 J1.A1-B12 J1.B1-A12 J3.5 J3.7 J3.11 J4.6 J4.9 J4.10 J4.11 J4.12 J4.13 J4.14 J4.15 J5.1 J7.6 J7.7 J7.8 J7.9 J7.10 J8.4 Q1.2 R1.2 R7.1 R8.2 R9.1 R10.1 R11.1 R12.1 R19.1 R23.1 R29.1 R33.1 R36.1 R37.1 R41.1 R45.1 R48.1 R50.1 R53.1 R61.1 R79.1 RV1.1 RV2.1 RV3.1 RV4.1 RV5.1 RV6.1 RV7.1 RV8.1 U1.16 U1.31 U1.38 U1.51 U1.61 U1.83 U1.94 U1.107 U1.120 U1.130 U2.4 U2.6 U2.9 U4.2 U5.2 Y1.2 Y1.4 Y3.2 | length 12.2
  SIG BOT w0.4: v1(-8.052,2.261) -7.955,2.164 -7.528,2.164 -7.391,2.028 C100.2@-7.391,2.007 -7.381,1.996 -5.827,1.996 C98.2@-5.817,1.985 -5.68,2.032 v1(-5.056,2.032) ; v1(-7.849,-3.729) -7.941,-3.637 -7.941,-3.206 C101.2@-8.077,-3.069 C99.2@-5.918,-3.069 -5.918,-3.091 -6.561,-3.734 v1(-6.629,-3.734) ; v1(-4.14,-4.039) IC11.J1@-4.14,-3.429 ; IC11.E3@-0.94,-1.829 -0.94,-1.826 -0.305,-1.191 v2(-0.305,-1.168) ; IC11.D7@-0.14,1.371 0.26,0.971 0.26,0.808 v2(0.279,0.788) ; IC11.C3@0.66,-1.829 0.66,-1.826 1.034,-1.452 1.034,-1.142 v2(1.053,-1.123) ; IC11.B7@1.46,1.371 1.462,1.369 1.462,0.98 v5(1.655,0.787) ; IC11.A1@2.26,-3.429 2.262,-3.431 2.61,-3.431 v1(2.747,-3.568) ; IC11.A3@2.26,-1.829 2.26,-1.321 2.411,-1.17 v2(2.411,-1.143)
  other v3: -27.645,14.596 -26.645,14.596 -25.645,14.596 -27.645,15.596 -26.645,15.596 -25.645,15.596 -27.645,16.596 -26.645,16.596 -25.645,16.596
I2C_CODEC.I2C_SCL: IC3.8 NT2.1 R14.1
I2C_CODEC.I2C_SDA: IC3.9 NT5.1 R15.1
IN_RF_LEFT: C36.1 C37.1 C38.1 C39.1 C59.1 C60.1 C61.1 C62.1 R17.2 R18.2 R19.2 R39.2 R40.2 R41.2
IN_RF_RIGHT: C41.1 C42.1 C43.1 C44.1 C64.1 C65.1 C66.1 C67.1 R21.2 R22.2 R23.2 R43.2 R44.2 R45.2
LDO_EN: C68.2 R46.1 R48.2 U2.5 U4.3 U5.3 | length 17.8
  SIG TOP w0.25: U2.5@28.188,-38.694 28.188,-38.684 v1(29.032,-38.684)
  SIG TOP w0.4: U4.3@28.014,-32.451 29.022,-32.451 v1(29.032,-32.461) ; U5.3@28.024,-28.829 28.049,-28.854 v1(29.058,-28.854) ; v1(30.556,-35.204) 30.556,-35.198 R46.1@31.191,-35.198 cw(c31.191,-35.224) 31.217,-35.224 R48.2@31.217,-36.582
  SIG TOP w0.5: R48.2@31.217,-36.582 32.568,-36.582 ccw(c32.568,-36.511) C68.2@32.639,-36.511
  SIG BOT w0.25: 34.112,-39.319 34.112,-35.839 ; 34.138,-29.489 34.125,-29.502 34.125,-33.084 34.112,-33.096 34.112,-35.839 ; 35.636,-35.839 34.112,-35.839
MCU_BOOT0: R12.2 S1.2 U1.138 | length 14.6
  SIG TOP w0.149: S1.2@-10.961,23.244 -10.961,21.027 -10.558,20.625 R12.2@-10.537,20.625 -10.537,18.665 -6.609,14.737 -6.609,10.459 U1.138@-6.632,10.436
MCU_HSE_IN: C5.1 U1.23 Y1.1 | length 6.7
  SIG TOP w0.178: v1(-13.238,-2.311) -13.059,-2.49 U1.23@-11.557,-2.49
  SIG BOT w0.178: Y1.1@-16.283,-1.499 -16.1,-1.499 C5.1@-14.883,-0.281 -14.867,-0.296 -14.867,-1.16 -13.716,-2.311 v1(-13.238,-2.311)
MCU_HSE_OUT: C4.1 U1.24 Y1.3 | length 6.2
  SIG TOP w0.178: v1(-13.259,-3.175) -13.212,-3.175 -13.027,-2.99 U1.24@-11.557,-2.99
  SIG BOT w0.178: Y1.3@-15.929,-4.256 -15.553,-4.256 -14.63,-5.18 C4.1@-14.552,-5.18 -14.537,-5.165 -14.537,-4.301 -13.991,-3.755 -13.444,-3.208 -13.292,-3.208 v1(-13.259,-3.175)
MCU_LSE_IN: C7.1 U1.8 Y2.1 | length 4.7
  SIG TOP w0.178: Y2.1@-15.875,5.009 -15.836,4.97 -14.825,4.97 -14.43,4.574 C7.1@-13.919,4.574 -13.325,4.574 -12.889,5.01 U1.8@-11.557,5.01
MCU_LSE_OUT: C6.1 U1.9 Y2.2 | length 5.2
  SIG TOP w0.178: Y2.2@-15.875,2.509 -15.811,2.574 -14.825,2.574 -14.278,3.121 -14.072,3.121 C6.1@-13.97,3.223 -13.97,3.229 -13.807,3.392 -13.801,3.392 -12.683,4.51 U1.9@-11.557,4.51
MCU_NRST: C3.1 SW1.3 SW1.4 U1.25 | length 40
  SIG TOP w0.149: C3.1@-19.452,28.092 -19.415,28.055 -19.415,26.781 SW1.3@-19.177,26.543 SW1.4@-19.177,22.443 -19.177,18.288 -9.525,8.636 -9.525,8.001 -6.985,5.461 -6.985,-1.174 -8.605,-2.794 -10.04,-2.794 -10.736,-3.49 U1.25@-11.557,-3.49
MCU_VCAP1: C92.1 U1.71
MCU_VCAP2: C93.1 U1.106 | length 2
  SIG TOP w0.178: U1.106@9.794,7.51 11.064,7.51 v1(11.073,7.52)
  SIG BOT w0.178: C93.1@10.352,7.518 v1@11.073,7.519
MCU_VDDA: C89.1 C90.1 FB1.1 U1.32 U1.33
NetC3_2: C3.2 D3.2 SW1.1 SW1.2 | length 7.4
  SIG TOP w0.149: C3.2@-18.495,28.092 -18.495,27.411 -17.59,26.506 D3.2@-16.256,26.506 ; SW1.2@-17.577,22.443 SW1.1@-17.577,26.543
NetC24_2: C24.2 C25.2 C26.2 C27.2 IC3.6
NetC54_2: C54.2 IC3.23
NetC55_2: C55.2 IC3.19
NetC56_1: C56.1 R34.2
NetC57_1: C57.1 R35.2
NetC107_1: C107.1 IC12.1 IC12.4 R60.1
NetD2_1: D2.1 Q1.3 | length 2.7
  SIG TOP w0.149: Q1.3@9.33,26.416 9.33,23.886 D2.1@9.467,23.749
NetD2_2: D2.2 R5.1 | length 1.6
  SIG TOP w0.149: R5.1@7.03,23.673 7.106,23.749 D2.2@8.567,23.749
NetD4_1: D4.1 S1.3 | length 2.3
  SIG TOP w0.149: D4.1@-12.485,20.955 -12.473,20.967 -12.473,23.232 S1.3@-12.461,23.244
NetIC3_11: IC3.11 R36.2
NetIC3_13: IC3.13 R37.2
NetIC3_15: IC3.15 R35.1
NetIC3_20: IC3.20 IC3.22 R34.1
NetIC4_1: IC4.1 IC4.4 R18.1
NetIC5_1: IC5.1 IC5.4 R22.1
NetIC6_1: IC6.1 IC6.4 R40.1
NetIC7_1: IC7.1 IC7.4 R44.1
NetIC8_1: IC8.1 IC8.4 R28.1
NetIC9_1: IC9.1 IC9.4 R32.1
NetIC10_1: IC10.1 R13.1 | length 1.3
  SIG TOP w0.4: IC10.1@23.436,-16.483 23.58,-16.483 R13.1@24.37,-15.693
NetIC12_3: IC12.3 R59.1 R61.2
NetIC13_1: IC13.1 IC13.4 R62.1
NetIC14_1: IC14.1 IC14.4 R63.1
NetIC15_1: IC15.1 IC15.4 R64.1
NetIC16_1: IC16.1 IC16.4 R65.1
NetIC17_1: IC17.1 IC17.4 R66.1
NetIC18_1: IC18.1 IC18.4 R67.1
NetIC19_1: IC19.1 IC19.4 R70.1
NetIC20_1: IC20.1 IC20.4 R71.1
NetJ1_A5: J1.A5 R11.2 | length 1.5
  SIG TOP w0.3: R11.2@48.456,-1.676 48.481,-1.676 48.656,-1.501 48.993,-1.501 49.219,-1.275 J1.A5@49.813,-1.275
NetJ1_B5: J1.B5 R10.2 | length 1.4
  SIG TOP w0.3: R10.2@48.456,1.575 48.47,1.589 48.931,1.589 49.066,1.725 J1.B5@49.813,1.725
OUT_BIAS_L: C47.2 R26.1 R27.1
OUT_BIAS_R: C51.2 R30.1 R31.1
OUT_FILT_L: C49.1 IC8.3 R27.2
OUT_FILT_R: C53.1 IC9.3 R31.2
OUT_RC_L: C48.1 R28.2
OUT_RC_R: C52.1 R32.2
PA1: NT39.2 U1.35
PA2: NT41.2 U1.36
PA3: NT15.2 U1.37
PA4: U1.40
PA5: NT37.2 U1.41
PA6: NT44.2 U1.42
PA7: NT68.2 U1.43
PA8: NT61.2 U1.100
PA11: NT60.2 U1.103
PA12: NT63.2 U1.104
PB0: NT18.2 U1.46
PB1: NT21.2 U1.47
PB2: R68.2 U1.48
PB5: NT35.2 U1.135 | length 0.9
  SIG TOP w0.171: U1.135@-5.132,10.436 NT35.2@-5.132,11.296 U1.135@-5.08,11.347
PB6: NT2.2 U1.136
PB7: NT5.2 U1.137
PB8: NT75.2 U1.139
PB9: NT73.2 U1.140
PB10: NT24.2 U1.69
PB11: NT27.2 U1.70
PB12: NT29.2 U1.73
PB13: NT32.2 U1.74
PB14: NT77.2 U1.75
PB15: U1.76
PC0: NT45.2 U1.26
PC1: NT48.2 U1.27
PC2: NT42.2 U1.28
PC3: NT49.2 U1.29
PC4: NT58.2 U1.44
PC5: NT55.2 U1.45
PC6: NT69.2 U1.96
PC7: NT67.2 U1.97
PC8: NT66.2 U1.98
PC9: NT64.2 U1.99
PC10: NT56.2 U1.111
PC11: NT57.2 U1.112
PC12: NT59.2 U1.113
PC13: NT23.2 U1.7
PD0: NT74.2 U1.114
PD1: NT76.2 U1.115
PD2: U1.116
PD3: U1.117
PD4: U1.118
PD5: U1.119
PD6: NT38.2 U1.122
PD7: NT36.2 U1.123
PD8: NT87.2 U1.77
PD9: NT88.2 U1.78
PD10: NT89.2 U1.79
PD11: NT1.2 U1.80
PD12: NT4.2 U1.81
PD13: NT9.2 U1.82
PD14: NT71.2 U1.85
PD15: NT72.2 U1.86
PE0: NT90.2 U1.141
PE1: NT91.2 U1.142
PE2: NT7.2 U1.1
PE3: NT20.2 U1.2
PE4: NT26.2 U1.3
PE5: NT13.2 U1.4
PE6: NT17.2 U1.5
PE7: NT78.2 U1.58
PE8: NT79.2 U1.59
PE9: NT80.2 U1.60
PE10: NT81.2 U1.63
PE11: NT82.2 U1.64
PE12: NT83.2 U1.65
PE13: NT84.2 U1.66
PE14: NT85.2 U1.67
PE15: NT86.2 U1.68
PF0: NT3.2 U1.10
PF1: NT6.2 U1.11
PF2: NT8.2 U1.12
PF3: NT10.2 U1.13
PF4: NT12.2 U1.14
PF5: NT16.2 U1.15
PF6: NT51.2 U1.18
PF7: NT14.2 U1.19
PF8: NT52.2 U1.20
PF9: NT53.2 U1.21
PF10: NT54.2 U1.22
PF11: NT62.2 U1.49
PF12: NT19.2 U1.50
PF13: NT22.2 U1.53
PF14: NT25.2 U1.54
PF15: NT28.2 U1.55
PG0: NT30.2 U1.56
PG1: NT33.2 U1.57
PG2: NT40.2 U1.87
PG3: NT70.2 U1.88
PG4: NT46.2 U1.89
PG5: NT50.2 U1.90
PG6: U1.91
PG7: NT11.2 U1.92
PG8: R69.2 U1.93 | length 7.2
  SIG TOP w0.125: v1(7.468,1.016) 7.47,1.013 9.791,1.013 U1.93@9.794,1.01
  SIG BOT w0.125: R69.2@6.102,-3.246 6.119,-3.228 6.119,-0.332 v1(7.468,1.016)
PG9: NT43.2 U1.124
PG10: NT47.2 U1.125
PG11: NT31.2 U1.126
PG12: NT34.2 U1.127
PG13: U1.128
PG14: U1.129
PG15: NT65.2 U1.132
Pot1_Filtered: C110.1 NT39.1 R62.2
Pot1_Wiper: IC13.3 J6.2
Pot2_Filtered: C114.1 NT41.1 R64.2